# Altium PCB PCB1.PcbDoc
Units mm, origin at the board's own origin, x right, y up, seen from the top; angles counter-clockwise.
Board outline 146.43 x 124.56 mm, 2 copper layers (Top Layer, Bottom Layer); 76 components, 62 nets, 223 pads, 57 vias.
Unrouted connection lines stored in the file: 39.
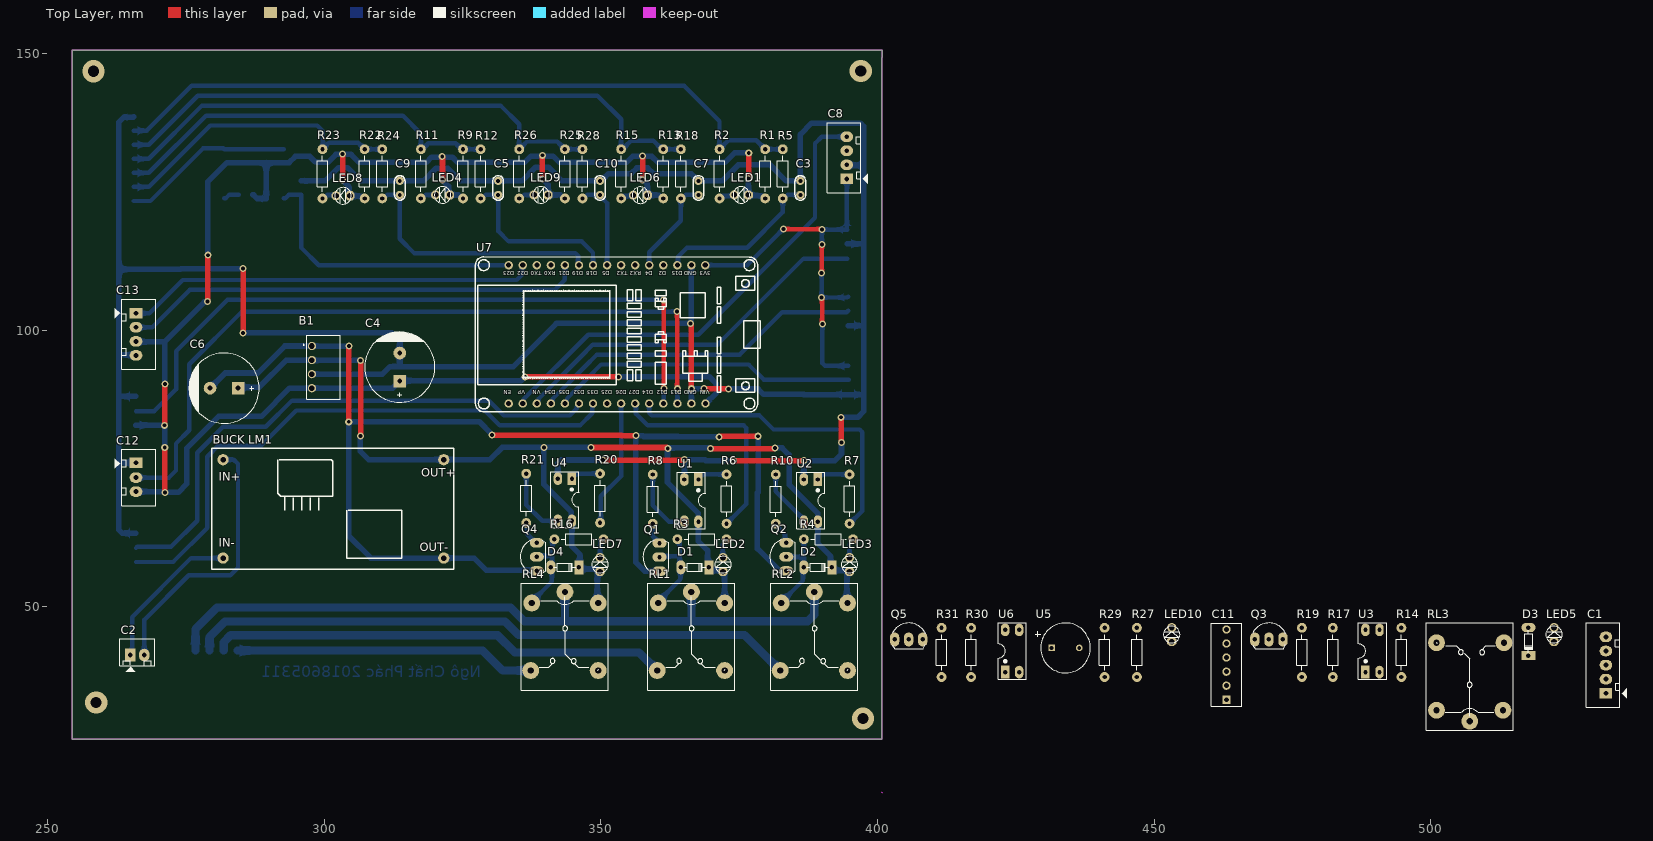
[diagram p0: Top Layer view]
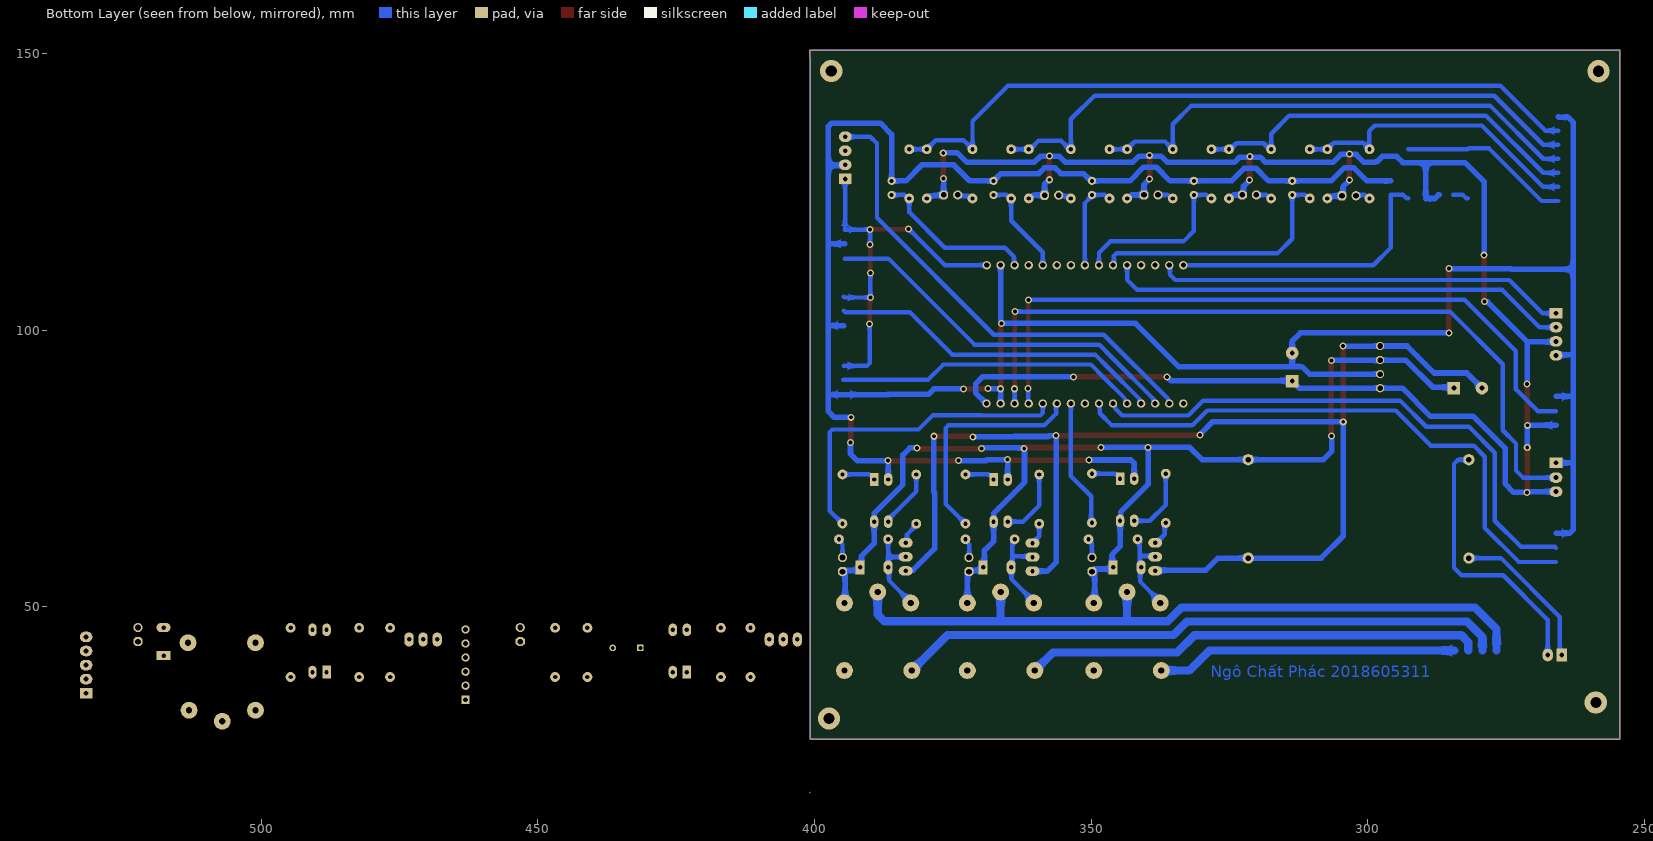
[diagram p1: Bottom Layer view, seen from below]

## Layer stack, top to bottom
Top Solder: solder mask 0.0102, Solder Resist, Dk 3.5
Top Layer: signal copper 0.0356
Dielectric 1: dielectric 0.32, FR-4, Dk 4.8
Bottom Layer: signal copper 0.0356
Bottom Solder: solder mask 0.0102, Solder Resist, Dk 3.5

## Board outline
254.457,26.086 400.812,26.086 400.812,35.103 400.812,35.077 400.812,148.006 400.886,150.647 254.508,150.647 254.457,150.597

## Design rules (kind name [scope] priority, off if disabled: settings)
Clearance [All] p1: gap=1 ignorepadtopadclearanceinfootprint=FALSE
PolygonConnect [All] p1: connectstyle=Relief reliefconductorwidth=0.254 reliefentries=4 polygonreliefangle="90 Angle" airgapwidth=0.254
RoomDefinition Sheet1 [InComponentClass('Sheet1')] p1: confinementstyle=ConfineIn formatcopy=TRUE lockcomponents=FALSE outline 402.031,27.508 535.61,27.508 535.61,49.886 402.031,49.886
RoutingVias [All] p1: holewidth=0.711 width=1.27 viastyle="Through Hole" minholewidth=0.711 minwidth=1.27 maxholewidth=0.711 maxwidth=1.27
SolderMaskExpansion [All] p1: expansion=0.102 istentingtop=FALSE
Width GND_ISO [InNet('GND_ISO')] p1: maxlimit=1 minlimit=1 preferedwidth=1
Width COM_O_1 [InNet('COM_O_1')] p2: maxlimit=1.5 minlimit=1.5 preferedwidth=1.5
Width OUT_RL1 [InNet('OUT_RL1')] p3: maxlimit=1.5 minlimit=1.5 preferedwidth=1.5
Width OUT_RL2 [InNet('OUT_RL2')] p4: maxlimit=1.5 minlimit=1.5 preferedwidth=1.5
Width OUT_RL3 [InNet('OUT_RL3')] p5: maxlimit=1.5 minlimit=1.5 preferedwidth=1.5
Width VCC_ISO [InNet('VCC5_ISO')] p6: maxlimit=1 minlimit=1 preferedwidth=1
Width GND [InNet('GND')] p7: maxlimit=1 minlimit=1 preferedwidth=1
Width VCC [InNet('VCC5')] p8: maxlimit=1 minlimit=1 preferedwidth=1
Width SIGNAL [All] p9: maxlimit=0.8 minlimit=0.8 preferedwidth=0.8
30 further rules are at their usual default settings.

## Classes and differential pairs
component class Sheet1: B1 B? "BUCK LM1" C2 C4 C6 C8 C? D2 D4 LED1 LED2 LED3 LED7 LED10 Q1 Q4 Q5 R1 R3 R4 R7 R8 R9 R13 R15 R21 R28 R29 R30 R31 RL2 RL4 U1 U4 U5 U6 U7

## Components (designator, comment, footprint, x,y, rotation, side; value= is the part's Value field where it differs from the comment)
B1 "B0505S1W" B0505S1W 297.815,97.155 r270 top
"BUCK LM1" "Buck LM2596" "BUCK LM2596" 301.32,68.478 r0 top
C1 "Header5" Header5 531.673,34.417 r90 top
C2 "Header2" Header2 264.973,41.3 r0 top
C3 "104" "tu gom" 386.08,125.73 r90 top
C4 "Cap Pol3" CP2/5 313.69,90.805 r90 top value=C?
C5 "104" "tu gom" 331.47,125.73 r90 top
C6 "Cap Pol3" CP2/5 284.48,89.535 r180 top value=C?
C7 "104" "tu gom" 367.665,125.73 r90 top
C8 "SS_HUMI" Header4 394.462,127.356 r90 top
C9 "104" "tu gom" 313.69,125.73 r90 top
C10 "104" "tu gom" 349.885,125.73 r90 top
C11 "Header6" HDR6 463.093,33.223 r90 top
C12 "1_WIRE_2" Header3 266.014,75.921 r270 top
C13 "LCD_I2C" Header4 266.014,103.073 r270 top
D1 "100v" "DIODE 0.5A" 367.03,57.15 r180 top
D2 "100v" "DIODE 0.5A" 389.255,57.15 r180 top
D3 "100v" "DIODE 0.5A" 517.677,43.739 r90 top
D4 "100v" "DIODE 0.5A" 343.535,57.15 r180 top
LED1 "LED 3mm" LED-3MM-BLUE 375.285,124.46 r180 top
LED2 "LED 3mm" LED-3MM-BLUE 372.11,57.785 r90 top
LED3 "LED 3mm" LED-3MM-BLUE 394.97,57.785 r90 top
LED4 "LED 3mm" LED-3MM-BLUE 321.31,124.46 r180 top
LED5 "LED 3mm" LED-3MM-BLUE 522.3,45.136 r90 top
LED6 "LED 3mm" LED-3MM-BLUE 357.048,124.409 r180 top
LED7 "LED 3mm" LED-3MM-BLUE 349.885,57.785 r90 top
LED8 "LED 3mm" LED-3MM-BLUE 303.301,124.308 r180 top
LED9 "LED 3mm" LED-3MM-BLUE 339.09,124.46 r180 top
LED10 "LED 3mm" LED-3MM-BLUE 453.212,45.136 r90 top
Q1 "C1815" C1815_cam 360.629,59.004 r90 top
Q2 "C1815" C1815_cam 383.54,59.055 r90 top
Q3 "C1815" C1815_cam 470.764,44.12 r0 top
Q4 "C1815" C1815_cam 338.455,59.055 r90 top
Q5 "C1815" C1815_cam 405.663,44.12 r0 top
R1 "10K" R1/4W 379.73,132.715 r270 top value="R1/4W - 1K"
R2 "220R" R1/4W 371.475,132.715 r270 top value="R1/4W - 1K"
R3 "510R" R1/4W 372.745,62.23 r180 top value="R1/4W - 1K"
R4 "390R" R1/4W 395.605,62.23 r180 top value="R1/4W - 1K"
R5 "1K" R1/4W 382.905,123.825 r90 top value="R1/4W - 1K"
R6 "100R" R1/4W 372.745,65.055 r90 top value="R1/4W - 1K"
R7 "220R" R1/4W 394.97,65.055 r90 top value="R1/4W - 1K"
R8 "510R" R1/4W 359.41,73.929 r270 top value="R1/4W - 1K"
R9 "10K" R1/4W 325.12,132.715 r270 top value="R1/4W - 1K"
R10 "560R" R1/4W 381.635,73.929 r270 top value="R1/4W - 1K"
R11 "220R" R1/4W 317.5,132.715 r270 top value="R1/4W - 1K"
R12 "1K" R1/4W 328.295,123.825 r90 top value="R1/4W - 1K"
R13 "10K" R1/4W 361.315,132.715 r270 top value="R1/4W - 1K"
R14 "510R" R1/4W 494.716,37.338 r90 top value="R1/4W - 1K"
R15 "220R" R1/4W 353.695,132.715 r270 top value="R1/4W - 1K"
R16 "510R" R1/4W 350.52,62.23 r180 top value="R1/4W - 1K"
R17 "100R" R1/4W 482.321,37.338 r90 top value="R1/4W - 1K"
R18 "1K" R1/4W 364.49,123.825 r90 top value="R1/4W - 1K"
R19 "510R" R1/4W 476.733,37.338 r90 top value="R1/4W - 1K"
R20 "100R" R1/4W 349.885,65.205 r90 top value="R1/4W - 1K"
R21 "510R" R1/4W 336.55,74.079 r270 top value="R1/4W - 1K"
R22 "10K" R1/4W 307.34,132.715 r270 top value="R1/4W - 1K"
R23 "220R" R1/4W 299.72,132.715 r270 top value="R1/4W - 1K"
R24 "1K" R1/4W 310.515,123.825 r90 top value="R1/4W - 1K"
R25 "10K" R1/4W 343.535,132.715 r270 top value="R1/4W - 1K"
R26 "220R" R1/4W 335.28,132.715 r270 top value="R1/4W - 1K"
R27 "510R" R1/4W 446.913,37.338 r90 top value="R1/4W - 1K"
R28 "1K" R1/4W 346.71,123.825 r90 top value="R1/4W - 1K"
R29 "510R" R1/4W 441.071,37.338 r90 top value="R1/4W - 1K"
R30 "100R" R1/4W 416.941,37.338 r90 top value="R1/4W - 1K"
R31 "510R" R1/4W 411.607,37.338 r90 top value="R1/4W - 1K"
RL1 "Relay" RELAY_SRA_05VDC_SL_C 366.395,52.705 r270 top
RL2 "Relay" RELAY_SRA_05VDC_SL_C 388.62,52.705 r270 top
RL3 "Relay" RELAY_SRA_05VDC_SL_C 507.06,29.337 r90 top
RL4 "Relay" RELAY_SRA_05VDC_SL_C 343.535,52.705 r270 top
U1 "PC817" DIP4/W0.3 367.665,73.028 r180 top
U2 "PC817" DIP4/W0.3 389.255,73.028 r180 top
U3 "PC817" DIP4/W0.3 488.213,38.227 r0 top
U4 "PC817" DIP4/W0.3 344.805,73.178 r180 top
U5 "BUZZ" BUZZER_D9_TH 435,42.596 r0 top
U6 "PC817" DIP4/W0.3 423.088,38.227 r0 top
U7 "ESP32_MODULE copy" ESP32-WIFIMODULE-FOOTPRINT 352.889,101.388 r90 top

## Footprints (in the part's own frame and the unit in brackets; to place one, negate y for a bottom-side part, rotate by r counter-clockwise, add the part's x,y. Pads: shape width x height; smd on the part's side, far side on the other; paste and mask are expansions set on the pad)
B0505S1W [mm]
  round 1.5 hole 1: 1(0,0) 2(2.54,0) 3(5.08,0) 4(7.62,0)
  silkscreen extent -1.99,-1.6 9.61,5.1, body extent -1.99,-0.9 9.61,5.1, height 10.1
"BUCK LM2596" [mil]
  round 80 hole 40: 1(-770,320) 2(-770,-380) 3(800,-380) 4(800,320)
  silkscreen extent -850,-460 870,400
BUZZER_D9_TH [mm]
  rect 1.2x1.2 hole 0.7: 1(-3.5,0)
  round 1.2 hole 0.7: 2(1.5,0)
  silkscreen extent -6.5,-4.5 3.5,4.5, body extent -5.5,-4.5 3.5,4.5, height 5.5
C1815_cam [mil]
  oval 66x100 hole 32: 1(-100,0) 2(0,0) 3(100,0)
  silkscreen extent -117,-65 120,118, body extent -109,-66 109,95, height 245
CP2/5 [mil]
  rect 90x90 hole 35: 1(0,0)
  round 90 hole 35: 2(200,0)
  silkscreen extent -150,-250 350,250, body extent -142,-246 350,246, height 984
"DIODE 0.5A" [mil] "Diode muoi, xung"
  oval 65x100 hole 32: 1(100,0)
  rect 65x100 hole 32: 2(-100,0)
  silkscreen extent -80,-30 80,28, body extent -108,-33 108,32, height 61
DIP4/W0.3 [mil]
  rect 60x90 hole 31: 1(0,0)
  oval 60x90 hole 31: 2(100,0) 3(100,300) 4(0,300)
  silkscreen extent -50,-50 150,350, body extent -59,-10 159,305, height 170
ESP32-WIFIMODULE-FOOTPRINT [mil]
  round 60 hole 36: 1(-575.9,768.25) 2(-575.9,668.25) 3(-575.9,568.25) 4(-575.9,468.25) 5(-575.9,368.25) 6(-575.9,268.25) 7(-575.9,168.25) 8(-575.9,68.25) 9(-575.9,-31.75) 10(-575.9,-131.75) 11(-575.9,-231.75) 12(-575.9,-331.75) 13(-575.9,-431.75) 14(-575.9,-531.75) 15(-575.9,-631.75) 16(408.35,-630.18) 17(408.35,-531.75) 18(408.35,-431.75) 19(408.35,-331.75) 20(408.35,-231.75) 21(408.35,-131.75) 22(408.35,-31.75) 23(408.35,68.25) 24(408.35,168.25) 25(408.35,268.25) 26(408.35,368.25) 27(408.35,468.25) 28(408.35,568.25) 29(408.35,668.25) 30(408.35,768.25)
  silkscreen extent -635,-1023 468,1005
HDR6 [mm] "Connector; Header; 6 Position"
  rect 1.5x1.5 hole 0.9: 1(0,0)
  round 1.5 hole 0.9: 2(2.54,0) 3(5.08,0) 4(7.62,0) 5(10.16,0) 6(12.7,0)
  silkscreen extent -1.14,-2.79 13.84,2.74, body extent -1.27,-2.92 13.97,2.88, height 11.72
Header2 [mil] "CON2"
  rect 75x90 hole 34: 1(0,0)
  oval 75x90 hole 34: 2(100,0)
  silkscreen extent -75,-118 175,115, body extent -68,-70 168,107, height 236
Header3 [mil] "CON 3"
  rect 75x90 hole 34: 1(-5,0)
  oval 75x90 hole 34: 2(100,0) 3(200,0)
  silkscreen extent -100,-150 300,140, body extent -95,-90 295,136, height 276
Header4 [mil] "CON4"
  rect 75x90 hole 34: 1(0,0)
  oval 75x90 hole 34: 2(100,0) 3(200,0) 4(300,0)
  silkscreen extent -100,-150 400,140, body extent -90,-90 398,136, height 276
Header5 [mil] "CON5"
  rect 75x90 hole 34: 1(0,0)
  oval 75x90 hole 34: 2(100,0) 3(200,0) 4(300,0) 5(400,0)
  silkscreen extent -100,-150 500,140
LED-3MM-BLUE [mil]
  oct 65x65 hole 40: 1(-55,0)
  round 65 hole 40: 2(45,0)
  silkscreen extent -64,-59 54,59, body extent -72,-65 54,65, height 184
R1/4W [mil]
  round 70 hole 31: 1(0,0) 2(350,0)
  silkscreen extent 48,-38 302,38, body extent -40,-47 386,47, height 111
RELAY_SRA_05VDC_SL_C [mil] "Relay SPDT, 5 pin, 10A,W 650mil, L 800mil, H 800mil"
  round 120 hole 45: 1(559.06,-243.78) 2(559.06,236.22) 3(78.74,236.22) 4(0,0) 5(78.74,-236.22)
  silkscreen extent -63,-311 700,310, body extent -55,-306 697,304, height 602
"tu gom" [mm] "Tu gom mini"
  round 1.5 hole 0.7: 1(-1.27,0) 2(1.27,0)
  silkscreen extent -2.25,-0.97 2.22,0.97, body extent -2.92,-0.85 2.92,0.85, height 6.12

## Part data
B1: "Power Supply", Manufacturer_Name=Mornsun, Manufacturer_Part_Number=B0505S-1W, Datasheet Link=https://www.mornsun-power.com/uploads/pdf/B_D-1W.pdf, Height=10.41mm
C1: "Header IDC, 5 x 1 Pin Vertical 2.54mm Pitch (Non-Boxed, Male)", Manufacturer="W¨¹rth Elektronik eiSos GmbH", partNo=613002143121, ComponentLink1 Description=Manufacturer, ComponentLink1URL=http://www.we-online.com, ComponentLink2 Description=Datasheet, ComponentLink2URL=http://katalog.we-online.de/em/datasheet/6130xx143121.pdf, Created by="Karrer Zheng", Created Date="29 March 2013", NoPins=02
C2: "Header IDC, 2 x 1 Pin Vertical 2.54mm Pitch (Non-Boxed, Male)", Manufacturer="W¨¹rth Elektronik eiSos GmbH", partNo=613002143121, ComponentLink1 Description=Manufacturer, ComponentLink1URL=http://www.we-online.com, ComponentLink2 Description=Datasheet, ComponentLink2URL=http://katalog.we-online.de/em/datasheet/6130xx143121.pdf, Created by="Karrer Zheng", Created Date="29 March 2013", NoPins=02
C3 C5 C7 C9 C10: library part "Tu gom 104 50V", "Cắm", Chung_Loai=Cắm, Don_Vi=Con, Ma_Hang=MH004761, So_Chan=2, Ten_Linh_Kien="Tụ gốm 104 100nF 50V"
C4 C6: "Polarized Capacitor (Surface Mount)", LatestRevisionDate=17-Jul-2002, LatestRevisionNote="Re-released for DXP Platform.", PackageReference=C0805, Publisher="Altium Limited"
C8 C13: library part Header4, "Header IDC, 4 x 1 Pin Vertical 2.54mm Pitch (Non-Boxed, Male)", Manufacturer="W¨¹rth Elektronik eiSos GmbH", partNo=613002143121, ComponentLink1 Description=Manufacturer, ComponentLink1URL=http://www.we-online.com, ComponentLink2 Description=Datasheet, ComponentLink2URL=http://katalog.we-online.de/em/datasheet/6130xx143121.pdf, Created by="Karrer Zheng", Created Date="29 March 2013", NoPins=02
C11: "Header IDC, 6 x 1 Pin Vertical 2.54mm Pitch (Non-Boxed, Male)", Manufacturer="W¨¹rth Elektronik eiSos GmbH", partNo=613002143121, ComponentLink1 Description=Manufacturer, ComponentLink1URL=http://www.we-online.com, ComponentLink2 Description=Datasheet, ComponentLink2URL=http://katalog.we-online.de/em/datasheet/6130xx143121.pdf, Created by="Karrer Zheng", Created Date="29 March 2013", NoPins=02
C12: library part Header3, "Header IDC, 3 x 1 Pin Vertical 2.54mm Pitch (Non-Boxed, Male)", Manufacturer="W¨¹rth Elektronik eiSos GmbH", partNo=613002143121, ComponentLink1 Description=Manufacturer, ComponentLink1URL=http://www.we-online.com, ComponentLink2 Description=Datasheet, ComponentLink2URL=http://katalog.we-online.de/em/datasheet/6130xx143121.pdf, Created by="Karrer Zheng", Created Date="29 March 2013", NoPins=02
D1 D2 D3 D4: library part "Diode 1N4148", "Cắm", Chung_Loai=Cắm, Don_Vi=Con, Ma_Hang=MH001065, Ten_Linh_Kien="Diode 1N4148 DO35 450mA 100V ( 1N4148 DIP)"
LED1 LED2 LED3 LED4 LED5 LED6 LED7 LED8 LED9 LED10: library part "LED 3mm Xanh Duong", "Cắm", Chung_Loai=Cắm, Don_Vi=Con, Ma_Hang=MH009003, Ten_Linh_Kien="LED 3MM Xanh Dương SS (1000c)"
Q1 Q2 Q3 Q4 Q5: "NPN 600mW, ECB"
R1 R2 R3 R4 R5 R6 R7 R8 R9 R10 R11 R12 R13 R14 R15 R16 R17 R18 R19 R20 R21 R22 R23 R24 R25 R26 R27 R28 R29 R30 R31: library part R1/4W, "Resistor 1/4W"
RL1 RL2 RL3 RL4: library part RL_SRA-05VDC-SL-C, "Relay 5 Chan", Ma_Hang=MH009374, Ten="Relay 5V10A SRD-05VDC-SL-C Chính Hãng"
U1 U2 U3 U4 U6: "Single Opto"
U5: library part Speaker, "Loudspeaker"

## Via types
v1: diameter 1.27, hole 0.711, Top Layer to Bottom Layer, 53 vias
v2: diameter 4, hole 2, Top Layer to Bottom Layer, 4 vias

## Nets (pads, with @x,y where several pads share a name; then routed paths per layer and width w, separated by ;. In a path a pad name is that pad's centre, name@x,y a point inside that pad or via, vN(x,y) a via of type N, cw(c..) or ccw(c..) an arc to the next point about the centre after c; other vN are vias at no path point)
1_WIRE_1: C12.2 U7.13 | length 136.8
  Top Layer w0.8: v1(363.756,103.381) 363.806,103.331 363.806,89.483 v1(363.855,89.433) ; U7.13 U7.13@363.918,86.823
  Bottom Layer w0.8: C12.2 271.983,73.381 273.253,74.651 273.253,79.527 275.666,81.94 275.666,93.853 285.186,103.373 363.748,103.373 v1(363.756,103.381) ; U7.13 v1(363.855,89.433)
COM_O_1: C1.1 RL1.4 RL2.4 RL3.4 RL4.4 | length 133.4
  Bottom Layer w1.5: 276.758,42.113 276.758,45.974 280.666,49.882 333.728,49.882 336.179,47.431 343.381,47.431 343.535,47.585 ; RL4.4 343.535,47.585 ; RL1.4 366.395,47.585 ; RL2.4 388.62,48.616 387.435,47.431 366.549,47.431 366.395,47.585 ; 343.535,47.585 343.689,47.431 366.241,47.431 366.395,47.585
GND: "BUCK LM1.3" B1.1 C6.2 Q1.1 Q2.1 Q3.1 Q4.1 Q5.1 | length 229.5
  Top Layer w1: v1(304.468,83.465) 304.468,97.122 v1(304.498,97.152) ; v1(330.378,81.102) 330.416,81.064 353.719,81.064 353.809,80.974 v1(356.354,80.974) ; v1(371.422,80.744) 371.474,80.795 371.665,80.795 371.718,80.848 v1(378.435,80.848)
  Bottom Layer w1: C6.2 282.143,92.278 288.034,92.278 292.911,97.155 B1.1 297.817,97.153 v1(304.498,97.152) v1(304.498,97.152) ; v1(330.378,81.102) 330.378,81.153 328.066,83.465 v1(304.468,83.465) 304.468,62.816 308.458,58.826 321.64,58.826 327.127,58.826 329.309,56.644 338.326,56.644 Q4.1 ; Q1.1 357.937,56.464 356.354,58.047 v1(356.354,80.974) 357.635,80.974 357.805,80.804 363.969,80.804 363.996,80.777 371.389,80.777 v1(371.422,80.744) ; v1(378.435,80.848) 378.435,70.7 378.333,70.599 378.333,60.523 382.212,56.644 383.541,56.644 Q2.1@383.576,56.609
GND_ISO: B1.3 C3.2 C4.2 C5.2 C7.2 C8.2 C9.2 C10.2 C11.1 C12.1 C13.4 U1.2 U2.2 U3.2 U4.2 U6.2 U7.14 U7.17 | length 540.2
  Top Layer w1: v1(285.369,99.543) v1(285.369,111.127) ; v1(350.444,76.556) 350.493,76.507 364.96,76.507 365.081,76.628 v1(365.154,76.628) ; v1(366.268,101.244) 366.268,101.171 366.395,101.044 v1(366.395,89.432) ; v1(368.684,89.484) 368.722,89.446 373.037,89.446 v1(373.075,89.408) ; v1(374.015,76.454) v1(386.715,76.454) ; v1(393.446,84.277) 393.484,84.239 393.484,79.743 v1(393.522,79.705)
  Bottom Layer w1: 262.992,95.541 265.927,95.541 C13.4 ; 265.582,138.608 265.495,138.52 263.819,138.52 262.915,137.617 262.915,111.023 ; 266.014,63.322 263.501,63.322 262.915,63.908 262.915,76.175 ; C12.1 263.042,76.048 262.915,76.175 ; 266.014,88.036 262.966,88.036 262.915,87.986 ; v1(285.369,99.543) 312.217,99.543 313.69,98.069 C4.2 313.69,93.6 313.538,93.448 ; v1(285.369,111.127) 274.157,111.127 274.054,111.023 262.915,111.023 ; 295.91,127 300.212,127 302.625,129.413 304.241,129.413 306.654,127 C9.2 317.992,127 320.279,129.287 322.341,129.287 324.628,127 C5.2 335.772,127 338.263,129.491 340.552,129.491 343.043,127 C10.2 350.02,127 C10.2@350.116,127.096 ; B1.3 310.553,92.075 311.926,93.448 313.538,93.448 ; U4.2 342.252,73.19 342.252,75.97 342.838,76.556 v1(350.444,76.556) ; C10.2@350.338,127.25 351.414,128.326 355.513,128.326 356.524,129.337 358.486,129.337 359.497,128.326 366.339,128.326 C7.2 371.967,127 374.887,129.92 380.57,129.92 383.489,127 C3.2 386.08,135.382 388.126,137.428 396.936,137.428 397.521,136.842 397.521,129.808 ; U1.2 365.14,73.042 365.14,76.613 v1(365.154,76.628) 368.819,76.628 368.993,76.454 v1(374.015,76.454) ; U7.14 v1(366.395,89.432) 366.421,89.458 368.658,89.458 v1(368.684,89.484) ; U7.17 366.395,101.675 366.32,101.599 366.32,101.296 v1(366.268,101.244) v1(366.268,101.244) 342.012,101.246 334.215,93.448 313.538,93.448 ; v1(373.075,89.408) 378.44,89.408 379.439,88.409 386.715,88.409 386.736,88.388 394.695,88.388 394.716,88.367 397.445,88.367 397.521,88.29 ; U2.2@386.715,73.66 v1(386.715,76.454) 392.328,76.454 393.522,77.648 v1(393.522,79.705) ; v1(393.446,84.277) 396.469,84.277 397.521,85.33 397.521,88.29 ; C8.2 394.549,129.808 397.521,129.808 ; 394.538,115.621 397.485,115.621 ; 394.716,100.838 397.471,100.838 397.521,100.889 ; 262.915,76.175 262.915,87.986 ; 262.915,87.986 262.915,95.541 262.915,111.023 ; 397.521,88.29 397.521,100.889 ; 397.521,100.889 397.521,115.621 397.521,129.808
IN_1: C3.1 R5.1 U7.18 | length 29.8
  Bottom Layer w0.8: U7.18 363.994,111.899 363.994,113.335 365.594,114.935 376.479,114.935 382.905,121.361 R5.1 383.17,123.825 383.805,124.46 C3.1
IN_2: C7.1 R18.1 U7.20 | length 17.9
  Bottom Layer w0.8: U7.20 358.775,114.097 364.49,119.812 R18.1 364.755,123.825 365.39,124.46 C7.1
IN_3: C10.1 R28.1 U7.23 | length 16.7
  Bottom Layer w0.8: R28.1 346.975,123.825 347.61,124.46 C10.1 349.885,124.271 351.155,123.001 U7.23
IN_4: C5.1 R12.1 U7.24 | length 31
  Bottom Layer w0.8: R12.1 328.56,123.825 329.195,124.46 C5.1 331.47,117.932 333.35,116.053 346.558,116.053 348.615,113.995 U7.24
IN_5: C9.1 R24.1 U7.25 | length 46.6
  Bottom Layer w0.8: R24.1 310.78,123.825 311.415,124.46 C9.1 313.69,116.561 316.357,113.894 332.451,113.894 332.479,113.922 345.439,113.922 345.936,113.425 345.936,111.899 U7.25
"NetBUCK LM1_2": "BUCK LM1.2" C2.1 | length 27.9
  Bottom Layer w0.8: C2.1 265.16,41.488 265.16,42.465 265.303,42.608 265.303,48.153 275.977,58.826 281.762,58.826
NetD1_1: D1.1 Q1.2 R3.2 RL1.5 | length 17.2
  Bottom Layer w0.8: RL1.5@359.963,50.398 359.963,50.534 364.414,54.984 364.414,57.04 364.286,57.169 364.286,59.106 ; Q1.2@361.06,59.149 364.243,59.149 364.286,59.106 ; R3.2@364.157,62.362 364.286,62.233 364.286,59.106
NetD2_1: D2.1 Q2.2 R4.2 RL2.5 | length 16.6
  Bottom Layer w0.8: RL2.5@382.479,50.534 382.479,50.699 386.552,54.772 D2.1@386.552,57.15 ; Q2.2 383.565,59.03 386.715,59.03 ; D2.1 386.715,59.03 ; R4.2 386.715,59.03
NetD3_1: D3.1 Q3.2 R14.2 RL3.5
NetD4_1: D4.1 Q4.2 R16.2 RL4.5 | length 16.6
  Bottom Layer w0.8: RL4.5@337.236,50.5 337.236,50.635 341.097,54.496 341.097,54.588 341.173,54.664 341.173,57.117 341.249,57.193 341.249,59.284 ; Q4.2@338.333,59.225 341.19,59.225 341.249,59.284 ; R16.2@341.325,62.463 341.249,62.387 341.249,59.284
NetLED1_2: LED1.2 R2.2 | length 2.9
  Bottom Layer w0.8: R2.2 371.74,123.825 372.212,124.297 373.979,124.297 LED1.2
NetLED2_2: LED2.2 R3.1 | length 3.6
  Bottom Layer w0.8: LED2.2 372.059,58.979 372.059,61.28 372.745,61.965 R3.1
NetLED3_2: LED3.2 R4.1 | length 3.6
  Bottom Layer w0.8: LED3.2 394.97,61.33 395.605,61.965 R4.1
NetLED4_2: LED4.2 R11.2 | length 2.9
  Bottom Layer w0.8: R11.2 317.765,123.825 318.4,124.46 LED4.2
NetLED5_2: LED5.2 R14.1
NetLED6_2: LED6.2 R15.2 | length 2.5
  Bottom Layer w0.8: R15.2 353.96,123.825 354.381,124.246 355.742,124.246 LED6.2
NetLED7_2: LED7.2 R16.1 | length 3.5
  Bottom Layer w0.8: LED7.2 349.885,61.633 350.333,62.081 R16.1@350.215,62.199
NetLED8_2: LED8.2 R23.2 | length 2.7
  Bottom Layer w0.8: R23.2 299.985,123.825 300.62,124.46 LED8.2@302.157,124.46
NetLED9_2: LED9.2 R26.2 | length 2.9
  Bottom Layer w0.8: R26.2 335.545,123.825 336.18,124.46 LED9.2
NetLED10_2: LED10.2 R29.1
NetQ1_3: Q1.3 R8.2 | length 4.1
  Bottom Layer w0.8: R8.2 359.41,62.763 360.03,62.144 360.03,61.949 360.435,61.544 Q1.3
NetQ2_3: Q2.3 R10.2 | length 4.2
  Bottom Layer w0.8: R10.2 381.635,64.775 383.32,63.089 383.32,61.815 Q2.3
NetQ3_3: Q3.3 R19.2
NetQ4_3: Q4.3 R21.2 | length 4.5
  Bottom Layer w0.8: R21.2 336.737,65.002 336.737,63.118 338.26,61.595 Q4.3
NetQ5_2: Q5.2 R29.2 U5.2
NetQ5_3: Q5.3 R31.2
NetR6_2: R6.2 U1.1 | length 5.7
  Bottom Layer w0.8: U1.1 367.665,73.409 368.027,73.771 368.408,73.771 368.582,73.945 R6.2
NetR7_2: R7.2 U2.1 | length 6.3
  Bottom Layer w0.8: U2.1 389.255,73.409 389.617,73.771 389.998,73.771 390.172,73.945 R7.2
NetR8_1: R8.1 U1.3 | length 12.5
  Bottom Layer w0.8: R8.1 359.41,68.345 362.347,65.408 U1.3
NetR10_1: R10.1 U2.3 | length 10.6
  Bottom Layer w0.8: R10.1 381.635,70.869 386.715,65.789 U2.3
NetR17_2: R17.2 U3.1
NetR19_1: R19.1 U3.3
NetR20_2: R20.2 U4.1 | length 5.7
  Bottom Layer w0.8: U4.1 344.805,73.559 345.167,73.921 345.548,73.921 345.722,74.095 R20.2
NetR21_1: R21.1 U4.3 | length 12.5
  Bottom Layer w0.8: R21.1 336.55,68.427 339.419,65.558 341.931,65.558 341.931,65.476 U4.3@342.062,65.345
NetR27_2: R27.2 U5.1
NetR30_2: R30.2 U6.1
NetR31_1: R31.1 U6.3
OUT_1: R7.1 U7.11 | length 59.1
  Bottom Layer w0.8: U7.11 358.775,85.067 359.244,84.598 369.831,84.598 369.84,84.607 378.694,84.607 381.237,82.064 396.79,82.064 397.259,81.596 397.259,67.344 R7.1
OUT_2: R6.1 U7.10 | length 41.6
  Bottom Layer w0.8: U7.10 356.374,86.621 356.374,84.923 358.498,82.798 370.576,82.798 370.582,82.804 375.829,82.804 376.298,82.335 376.298,68.608 R6.1
OUT_3: R20.1 U7.9 | length 22.8
  Bottom Layer w0.8: R20.1@350.027,65.345 350.027,69.838 ; 350.027,69.992 353.695,73.66 U7.9
OUT_4: R17.1 U7.8
OUT_BTN_1: C11.2 R1.1 R2.1 R5.2 | length 129.8
  Bottom Layer w0.8: 265.582,136.068 267.925,136.068 276.062,144.204 365.066,144.204 371.475,137.795 R2.1 373.101,134.341 378.104,134.341 R1.1 R5.2
OUT_BTN_2: C11.3 R13.1 R15.1 R18.2 | length 111
  Bottom Layer w0.8: 265.582,133.528 268.325,133.528 277.201,142.404 349.416,142.404 353.695,138.125 R15.1 353.96,132.715 355.484,134.239 359.526,134.239 361.05,132.715 R18.2
OUT_BTN_3: C11.4 R25.1 R26.1 R28.2 | length 92.2
  Bottom Layer w0.8: 265.582,130.988 268.33,130.988 277.947,140.604 331.912,140.604 335.28,137.236 R26.1 336.677,134.112 342.138,134.112 R25.1 R28.2
OUT_BTN_4: C11.5 R9.1 R11.1 R12.2 | length 72.1
  Bottom Layer w0.8: 265.582,128.448 268.336,128.448 278.692,138.804 314.205,138.804 317.5,135.509 R11.1 317.765,132.715 318.857,133.807 323.763,133.807 324.855,132.715 R12.2
OUT_BTN_5: C11.6 R22.1 R23.1 R24.2 | length 54.2
  Bottom Layer w0.8: 265.582,125.908 268.342,125.908 279.438,137.004 298.753,137.004 299.802,135.955 R23.1@299.802,132.797 ; R23.1 R23.1@299.802,132.797 ; R24.2 R22.1 306.146,133.909 300.914,133.909 R23.1@299.802,132.797
OUT_BUZ: R30.1 U7.7 | length 105.2
  Bottom Layer w0.8: 266.014,58.115 272.72,58.115 278.879,64.274 278.879,77.14 280.903,79.164 288.638,79.164 294.974,85.5 329.032,85.5 331.734,82.798 346.276,82.798 348.476,84.999 348.476,86.621 U7.7
OUT_RL1: C1.2 RL2.1 | length 110.4
  Bottom Layer w1.5: 279.298,42.113 279.298,44.582 282.098,47.382 332.693,47.382 335.143,44.931 376.002,44.931 RL2.1
OUT_RL2: C1.3 RL1.1 | length 82.6
  Bottom Layer w1.5: 281.838,42.113 281.878,42.153 281.878,43.149 ; 281.838,43.586 283.134,44.882 331.39,44.882 334.493,41.779 356.929,41.779 RL1.1
OUT_RL3: C1.4 RL4.1 | length 54.5
  Bottom Layer w1.5: 284.378,42.113 328.675,42.113 332.283,38.505 RL4.1
OUT_RL4: C1.5 RL3.1
SCL: C13.1 U7.29 | length 74.4
  Bottom Layer w0.8: C13.1 268.443,103.073 274.462,109.092 334.847,109.092 335.776,110.021 335.776,111.621 U7.29
SDA: C13.2 U7.26 | length 83.7
  Bottom Layer w0.8: C13.2 268.981,100.533 275.74,107.292 341.683,107.292 343.535,109.144 U7.26
SS_FLAME: C8.4 U7.2 | length 86.8
  Bottom Layer w0.8: U7.2 336.054,86.899 336.054,87.515 347.748,99.209 367.611,99.209 388.737,120.335 388.737,133.772 389.941,134.976 C8.4
VCC5: "BUCK LM1.4" B1.2 C6.1 D1.2 D2.2 D3.2 D4.2 LED2.1 LED3.1 LED5.1 LED7.1 LED10.1 R27.1 RL1.3 RL2.3 RL3.3 RL4.3 U1.4 U2.4 U3.4 U4.4 U6.4 | length 221.2
  Top Layer w1: v1(306.603,80.874) v1(306.603,94.539) ; v1@339.701,78.867 v1(339.725,78.843) ; v1(348.258,78.843) 348.285,78.816 361.905,78.816 362.052,78.669 v1(362.125,78.669) ; v1(369.824,78.642) 369.857,78.609 381.304,78.609 381.435,78.74 v1(381.508,78.74)
  Bottom Layer w1: C6.1 284.645,89.7 288.284,89.7 293.199,94.615 B1.2 297.853,94.577 306.565,94.577 v1(306.603,94.539) ; v1(306.603,80.874) 306.553,80.823 306.553,78.13 308.077,76.606 321.64,76.606 329.971,76.606 332.208,78.843 v1(339.725,78.843) ; D4.2@346.253,56.863 349.436,56.863 LED7.1@349.606,56.693 ; D4.2@346.253,57.117 346.253,59.512 344.805,60.96 U4.4 344.705,65.658 344.705,67.158 339.725,72.138 v1(339.725,78.843) ; v1(348.258,78.843) 348.234,78.867 339.725,78.867 v1(339.725,78.843) ; RL4.3@349.377,50.641 349.377,55.933 349.4,55.956 LED7.1@349.4,56.567 ; v1(369.824,78.642) 369.751,78.642 369.63,78.763 363.212,78.763 363.17,78.721 362.177,78.721 v1(362.125,78.669) 362.077,78.621 362.077,72.496 367.625,66.948 367.625,65.448 U1.4 367.665,61.849 369.316,60.198 369.316,57.404 D1.2 369.57,56.919 369.895,56.594 371.904,56.594 LED2.1 372.11,56.268 372.395,55.983 RL1.3 ; v1(381.508,78.74) 382.778,78.74 384.048,77.47 384.048,72.115 389.215,66.948 389.215,65.448 U2.4 389.255,61.473 391.503,59.225 391.503,57.053 391.516,57.04 391.516,56.921 391.841,56.596 394.792,56.596 394.792,56.476 394.479,56.163 RL2.3@394.479,50.398
VCC5_ISO: B1.4 C4.1 C12.3 C13.3 LED1.1 LED4.1 LED6.1 LED8.1 LED9.1 R1.2 R9.2 R13.2 R22.2 R25.2 U7.15 | length 360.1
  Top Layer w1: v1(271.17,82.829) 271.196,82.855 271.196,90.246 v1(271.221,90.272) ; v1(271.215,78.797) 271.244,78.768 271.244,70.742 v1(271.272,70.714) ; v1(278.968,105.181) 278.994,105.207 278.994,113.538 v1(279.019,113.563) ; v1(303.352,131.826) 303.364,131.814 303.364,127.158 v1(303.377,127.145) ; v1(321.361,131.422) 321.412,131.372 v1(321.412,127.152) ; v1(336.334,91.58) 336.34,91.573 353.181,91.573 v1(353.187,91.567) ; v1(339.446,131.626) 339.471,131.6 v1(339.471,127.356) ; v1(357.539,131.472) 357.56,131.451 357.56,127.223 v1(357.581,127.202) ; v1(376.707,127.457) 376.733,127.483 376.733,132.029 v1(376.758,132.055)
  Bottom Layer w1: C12.3 271.072,70.841 271.199,70.714 273.66,70.714 275.179,72.233 275.179,78.672 280.961,84.455 288.696,84.455 293.776,89.535 B1.4 312.42,89.535 C4.1@313.792,90.907 ; 266.014,82.829 266.027,82.842 271.158,82.842 271.215,82.785 v1(271.215,78.797) ; C13.3 266.102,97.906 271.182,97.906 271.221,97.866 v1(271.221,90.272) ; 271.159,97.906 278.383,105.13 278.917,105.13 v1(278.968,105.181) ; v1(279.019,113.563) 279.019,126.848 282.473,130.302 289.56,130.302 ; 287.147,124.46 287.267,124.46 287.926,123.801 289.56,123.801 289.56,130.302 ; v1(303.377,127.145) 303.377,127.072 304.493,125.956 304.493,124.633 304.62,124.506 304.881,124.506 305.133,124.254 306.7,124.254 307.129,123.825 R22.2 ; C4.1 313.766,90.881 335.563,90.881 336.261,91.58 v1(336.334,91.58) ; v1(321.412,127.152) 321.412,127.079 322.501,125.99 322.501,124.666 LED4.1 324.274,124.46 324.909,123.825 R9.2 ; v1(339.471,127.356) 340.487,126.34 LED9.1 342.689,124.46 343.324,123.825 R25.2 ; v1(353.187,91.567) 353.31,91.567 353.312,91.568 357.781,91.568 357.832,91.619 369.616,91.619 370.918,90.318 370.918,88.698 368.979,86.76 U7.15 ; v1@357.539,131.446 357.565,131.42 359.231,131.42 360.325,130.326 372.465,130.326 374.193,132.055 v1(376.758,132.055) ; v1(357.539,131.472) 357.487,131.42 355.779,131.42 354.685,130.326 342.545,130.326 341.381,131.491 337.434,131.491 336.27,130.326 324.13,130.326 323.169,131.287 319.451,131.287 318.49,130.326 306.35,130.326 304.872,131.804 304.566,131.804 304.529,131.841 303.352,131.841 303.286,131.774 302.158,131.774 300.71,130.326 298.73,130.326 298.602,130.454 298.38,130.454 297.416,131.418 294.817,131.418 293.7,130.302 289.56,130.302 ; v1(357.581,127.202) 357.633,127.15 357.744,127.15 358.427,126.467 358.427,124.735 358.445,124.717 LED6.1 360.52,124.409 361.104,123.825 R13.2 ; v1(376.707,127.457) 376.682,127.432 LED1.1 376.805,124.337 379.007,124.337 379.519,123.825 R1.2
VCC12: "BUCK LM1.1" C2.2 | length 49
  Bottom Layer w0.8: C2.2 267.513,47.65 275.565,55.702 283.083,55.702 284.455,57.074 284.455,75.844 283.693,76.606 281.762,76.606
VCC33_ISO: C8.1 U7.16 | length 71.5
  Top Layer w0.8: v1(383.007,118.313) 383.045,118.275 v1@389.952,118.275 ; v1(389.941,110.388) 389.953,110.401 389.953,115.506 v1(389.966,115.519) ; v1(389.942,105.917) 390.005,105.854 390.005,101.18 v1(390.068,101.117)
  Bottom Layer w0.8: U7.16 376.453,111.76 v1(383.007,118.313) ; v1(389.942,105.917) v1(389.941,110.388) ; v1(389.942,105.917) 394.588,105.917 394.716,106.045 ; v1(389.966,115.519) 389.979,115.532 389.979,118.224 v1(389.992,118.237) 390.03,118.199 394.5,118.199 ; v1(390.068,101.117) 390.068,94.042 390.536,93.574 394.716,93.574 ; C8.1 394.5,127.317 394.5,118.199 ; 394.538,118.161 394.5,118.199
pads on no net: C8.3 RL1.2 RL2.2 RL3.2 RL4.2 U7.1 U7.3 U7.4 U7.5 U7.6 U7.12 U7.19 U7.21 U7.22 U7.27 U7.28 U7.30
copper on no net: | length 497
  Top Layer w0.8: 361.315,86.76 361.378,86.823 ; v1(361.372,105.492) 361.394,105.47 361.394,89.507 v1(361.417,89.484)
  Bottom Layer w0.8: 265.582,123.368 268.63,123.368 278.13,132.867 281.788,132.867 281.94,132.715 281.952,132.703 289.548,132.703 289.56,132.691 289.572,132.703 292.723,132.703 292.735,132.715 ; 266.014,60.655 266.226,60.867 272.347,60.867 277.079,65.598 277.079,77.885 281.748,82.555 289.483,82.555 294.228,87.3 329.778,87.3 332.479,84.598 344.431,84.598 345.697,85.864 345.697,86.186 346.075,86.564 346.075,86.76 ; 266.014,85.369 269.291,85.369 271.708,87.787 273.256,89.335 273.256,96.193 282.555,105.492 v1(361.372,105.492) ; 281.94,123.825 282.205,123.825 282.84,124.46 284.607,124.46 ; 292.735,123.825 293,123.825 293.635,124.46 295.91,124.46 295.91,114.884 299.034,111.76 333.375,111.76 ; 338.455,86.76 338.455,86.956 338.833,87.334 338.833,87.667 346.296,95.13 348.576,97.409 371.125,97.409 386.67,112.954 394.538,112.954 ; 340.995,86.76 340.995,86.956 341.373,87.334 341.373,87.661 347.042,93.33 349.321,95.609 375.111,95.609 382.795,103.294 394.505,103.294 394.716,103.505 ; 343.535,86.76 343.535,86.956 343.913,87.334 343.913,87.656 347.787,91.53 350.067,93.809 376.726,93.809 379.501,91.034 394.843,91.034 ; 361.315,86.76 361.366,86.811 361.366,89.433 v1(361.417,89.484)
  other v2: 397.434,29.845 258.826,32.741 258.369,146.812 397.002,146.863

## Keep-outs
Keep-Out Layer:
  lines w0.254: 400.812,16.434 400.863,16.485 ; 400.812,35.077 400.812,148.006 400.886,150.647 254.508,150.647 254.457,150.597 254.457,148.082 254.457,26.086 264.058,26.086 400.812,26.086 400.812,35.103

## Other copper
Bottom Layer:
  text "Ngô Chất Phác 2018605311" at 328.397,36.602 h3.5

## Text inside footprints (layer, text, board x,y; h text height)
"BUCK LM1": Top Overlay "IN+" at 281,72.796 h1.52; Top Overlay "IN-" at 281,60.858 h1.52; Top Overlay "OUT+" at 317.576,73.558 h1.52; Top Overlay "OUT-" at 317.322,60.096 h1.52
U7: Top Overlay "VIN" at 369.675,89.135 h0.75 r180; Top Overlay "GND" at 367.375,89.135 h0.75 r180; Top Overlay "D13" at 364.675,89.135 h0.75 r180; Top Overlay "D12" at 362.075,89.135 h0.75 r180; Top Overlay "D14" at 359.475,89.135 h0.75 r180; Top Overlay "D27" at 357.075,89.135 h0.75 r180; Top Overlay "D26" at 354.675,89.135 h0.75 r180; Top Overlay "D25" at 352.075,89.135 h0.75 r180; Top Overlay "D33" at 349.575,89.135 h0.75 r180; Top Overlay "D32" at 347.075,89.135 h0.75 r180; Top Overlay "D35" at 344.375,89.135 h0.75 r180; Top Overlay "D34" at 341.875,89.135 h0.75 r180; Top Overlay "VN" at 339.175,89.135 h0.75 r180; Top Overlay "VP" at 336.375,89.135 h0.75 r180; Top Overlay "EN" at 333.875,89.135 h0.75 r180; Top Overlay "3V3" at 369.875,110.635 h0.75 r180; Top Overlay "GND" at 367.375,110.635 h0.75 r180; Top Overlay "D15" at 364.875,110.635 h0.75 r180; Top Overlay "D2" at 361.875,110.635 h0.75 r180; Top Overlay "D4" at 359.375,110.635 h0.75 r180; Top Overlay "RX2" at 357.375,110.635 h0.75 r180; Top Overlay "TX2" at 354.875,110.635 h0.75 r180; Top Overlay "D5" at 351.675,110.635 h0.75 r180; Top Overlay "D18" at 349.375,110.635 h0.75 r180; Top Overlay "D19" at 346.875,110.635 h0.75 r180; Top Overlay "D21" at 344.375,110.635 h0.75 r180; Top Overlay "RX0" at 341.875,110.635 h0.75 r180; Top Overlay "TX0" at 339.375,110.635 h0.75 r180; Top Overlay "D22" at 336.875,110.635 h0.75 r180; Top Overlay "D23" at 334.375,110.635 h0.75 r180